# EAGLE board centerbody_Combine (EAGLE 9.4.2)
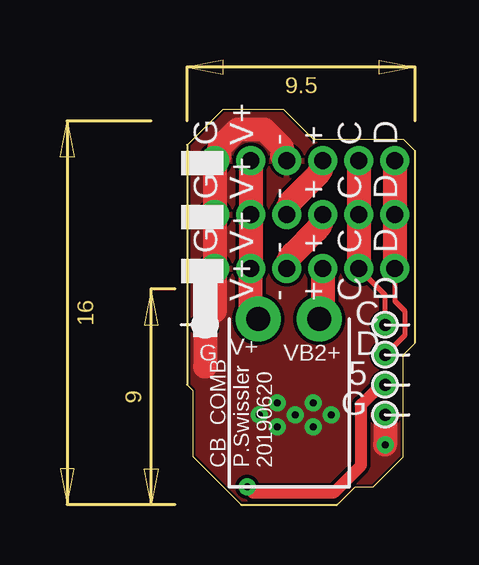
[diagram p0: board, top side]
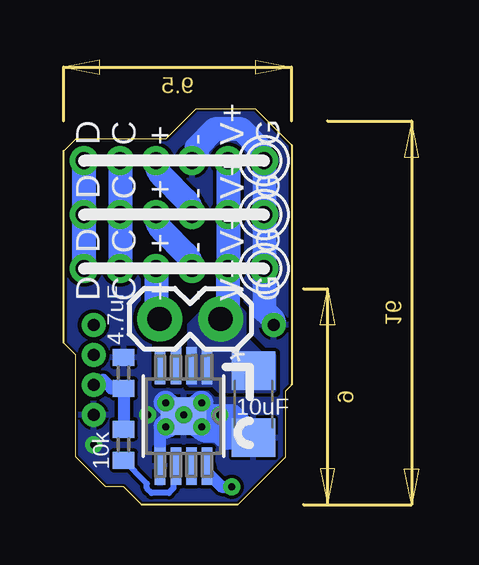
[diagram p1: board, bottom side, seen from below]

Size 9.5 x 16.5 mm. Coordinates in mm from the lower left corner, seen from the top.
Outline: 2.25,0 6.25,0 7,0.75 7.75,0.75 9,2 9,6.25 9.5,6.75 9.5,14.75 9,15.25 5.25,15.25 4,16.5 1.5,16.5 0,15 0,5 0.25,4.75 0.25,2 2.25,0
Copper layers (1*16): Top 0.035mm / dielectric 1.5mm / Bottom 0.035mm
Design rules "Swissler_Aggressive": minimum track width 0.1mm, minimum drill 0.3mm, track to track 0.15mm, track to pad 0.15mm, pad to pad 0.15mm, via to via 0.15mm, smd to smd 0.1mm, copper to edge 0.1mm, drill to drill 0.1mm, minimum pad ring 10mil, minimum via ring 8mil, stop-mask expansion 4mil, vias tented up to drill 25mil, thermal gap 0.125mm
Net classes: 1 Signal: width 0.2 mm, drill 0.3 mm; 2 High Power: width 0.75 mm, drill 0.5 mm; 3 Low Power: width 0.2 mm, drill 0.3 mm

## Footprints (pad centres in the part's own frame; a part is rotated, then mirrored left to right if it is on the bottom)
C1206 = smd 1.6 x 1.8: 1 -1.4,0; 2 1.4,0
C0402 = smd 0.7 x 0.9: 1 -0.65,0; 2 0.65,0
R0402 = smd 0.7 x 0.9: 1 -0.65,0; 2 0.65,0
1X02 = drill 1.016 pad 1.88: 1 0,0; 2 2.54,0
DGN8_1P57X1P89 = smd 1.564 x 0.441: 1 -2.095,0.975; 2 -2.095,0.325; 3 -2.095,-0.325; 4 -2.095,-0.975; 5 2.095,-0.975; 6 2.095,-0.325; 7 2.095,0.325; 8 2.095,0.975 | smd 1.57 x 1.89: EPAD 0,0
SIMPLEVIA = drill 0.5: P$1 0,0
COMPACT_6CONN_STRAIGHT = drill 0.7: P$1 0,0; P$2 1.5,0; P$3 3,0; P$4 4.5,0; P$5 6,0; P$6 7.5,0

## Placement (x,y rotation side)
C2  10uF  [C1206]  1.59,4.2 270 bottom
C4  4.7uF  [C0402]  7,5.5 90 bottom
R1  10k  [R0402]  7,2.5 90 bottom
SYSTEM_POWER_JUMPER  [1X02]  5.5,7.75 0 bottom
U1  TPS7A6650QDGNRQ1  [DGN8_1P57X1P89]  4.5,3.7 270 bottom
U$1  SIMPLE_VIA_CONNECTION  [SIMPLEVIA]  0.75,7.5 270 top
U$3  SIMPLE_VIA_CONNECTION  [SIMPLEVIA]  8.25,3.75 90 top
U$4  SIMPLE_VIA_CONNECTION  [SIMPLEVIA]  8.25,6.25 90 top
U$7  SIMPLE_VIA_CONNECTION  [SIMPLEVIA]  8.25,5 90 top
U$9  SIMPLE_VIA_CONNECTION  [SIMPLEVIA]  8.25,7.5 90 top
U$19  DOCK0  [COMPACT_6CONN_STRAIGHT]  1.15,14.35 180 bottom
U$20  DOCK1  [COMPACT_6CONN_STRAIGHT]  1.15,12.1 180 bottom
U$21  DOCK_2  [COMPACT_6CONN_STRAIGHT]  1.15,9.85 180 bottom

## Library data of the parts
C2 R1 U$1 U$3 U$4 U$7 U$9 U$19-U$21 = FA3D_lib
C4 = resistor
SYSTEM_POWER_JUMPER = SparkFun-Connectors
U1 = FA3D_lib; MANUFACTURER_PART_NUMBER: TPS7A6650QDGNRQ1; VENDOR: Texas Instruments

## Nets
+5V [Low Power]: C4.1 R1.2 U1.8 U$7.P$1
GND: C2.2 C4.2 U1.5 U1.EPAD U$1.P$1 U$3.P$1 U$19.P$1 U$19.P$3 U$20.P$1 U$21.P$1
N$2 [Signal]: R1.1 U1.6
SCL [Signal]: U$9.P$1 U$19.P$5 U$20.P$5 U$21.P$5
SDA [Signal]: U$4.P$1 U$19.P$6 U$20.P$6 U$21.P$6
V+ [High Power]: C2.1 SYSTEM_POWER_JUMPER.2 U1.1 U1.2 U$19.P$2 U$20.P$2 U$21.P$2
VB+0|VB-1: U$19.P$4 U$20.P$3
VB+1|VB-2: U$20.P$4 U$21.P$3
VBAT+,2 [High Power]: SYSTEM_POWER_JUMPER.1 U$21.P$4

## Tracks (layer width: path | path; a pad name or v marks a point on that pad's centre or on a via)
+5V  (via drill 0.3)
  Top 0.5: U$7.P$1 8.08,5 7.25,4.17 7.25,1.65 6.1,0.5 2.75,0.5 v2.5,0.75
  Bottom 0.5: U1.8 3.52,1.35 2.92,0.75 v2.5,0.75 | U$7.P$1 8.04,5.21 7.85,5.21 7.49,4.85 C4.1 R1.2
GND  (via drill 0.3)
  Top 0.61: U$19.P$1 1.15,14.52
  Top 1: 0.75,5.75 U$1.P$1 0.75,7.7 1.15,8.1 U$21.P$1 U$20.P$1 U$19.P$1 1.34,14.54 1.34,14.89 2.11,15.66 3.19,15.66 3.96,14.89 3.96,14.54 U$19.P$3 | U$3.P$1 v8.25,2.5
  Bottom 0.5: U1.5 5.47,3.02 v5.25,3.25
  Bottom 0.61: U$19.P$1 1.15,14.47
  Bottom 1: U$1.P$1 0.75,7.7 1.15,8.1 U$21.P$1 U$20.P$1 U$19.P$1 1.34,14.54 1.34,14.89 2.11,15.66 3.19,15.66 3.96,14.89 3.96,14.54 U$19.P$3 | U1.EPAD 2.49,3.7 C2.2 | C2.2 2.09,3.3 | C2.2 2.72,2.8 3.01,3.09 3.59,3.09 | 3.59,3.09 v3.75,3.25 | U1.EPAD v5.25,4.25 | U1.EPAD v3.75,4.25 | U1.EPAD 3.59,3.09 | U1.EPAD v5.25,3.25
  other vias: 4.5,3.75 3,3.75 6,3.75
  pour Top (rank 6): -0.75,16.75 -0.75,-1 9.75,-1 9.75,16.75
  pour Bottom (rank 6): -0.75,16.5 -0.75,-1 9.75,-1 9.75,16.5
N$2
  Bottom 0.25: U1.6 4.92,1.5 4.92,0.69 5.12,0.49 5.83,0.49 6.03,0.69 6.03,0.88 R1.1
SCL
  Top 0.2: U$9.P$1 8.25,8.75 U$21.P$5
  Top 1: U$19.P$5 U$20.P$5 U$21.P$5
  Bottom 1: U$19.P$5 U$20.P$5 U$21.P$5
SDA
  Top 0.2: U$21.P$6 8.65,8.49 9.06,8.09 9.06,7.06 U$4.P$1
  Top 1: U$19.P$6 U$20.P$6 U$21.P$6
  Bottom 1: U$21.P$6 U$20.P$6 U$19.P$6
V+
  Top 1: SYSTEM_POWER_JUMPER.2 2.96,7.77 2.65,8.09 U$21.P$2 U$20.P$2 U$19.P$2
  Bottom 1: SYSTEM_POWER_JUMPER.2 2.96,8.02 2.65,8.34 U$21.P$2 U$20.P$2 U$19.P$2
  pour Bottom (no thermals): 0.75,6.25 0.75,4.75 3,4.75 3.25,5 4.25,5 4.25,7.5 3.25,8.5 2.5,8.5 2,8 2,7 1.25,6.25
VB+0|VB-1
  Top 1: U$20.P$3 arc-45 4.42,12.75 5.39,13.72 arc45 U$19.P$4
  Bottom 1: U$20.P$3 arc-45 4.4,12.71 5.37,13.68 arc45 U$19.P$4
VB+1|VB-2
  Top 1: U$21.P$3 arc-45 4.41,10.48 5.38,11.45 arc45 U$20.P$4
  Bottom 1: U$21.P$3 arc-45 4.41,10.46 5.37,11.43 arc45 U$20.P$4
VBAT+,2
  Top 1: SYSTEM_POWER_JUMPER.1 5.5,7.95 5.65,8.1 U$21.P$4
  Bottom 1: U$21.P$4 5.65,8.1 5.5,7.95 SYSTEM_POWER_JUMPER.1

## Text on the board
tPlace: G | V+ | - | + | C | D | G / V+ / - / + / C / D | G / V+ / - / + / C / D | G / V+ / - / + / C / D | C | G | V+ | VB2+ | D | 5 | G | CB_COMB / P.Swissler / 20190620
bPlace: D / C / + / - / V+ / G | D / C / + / - / V+ / G | D / C / + / - / V+ / G | D / C / + / - / V+ / G